# EAGLE board OpenPMU (LEM) Motherboard V37 (Hall Effect) (EAGLE 9.4.0)
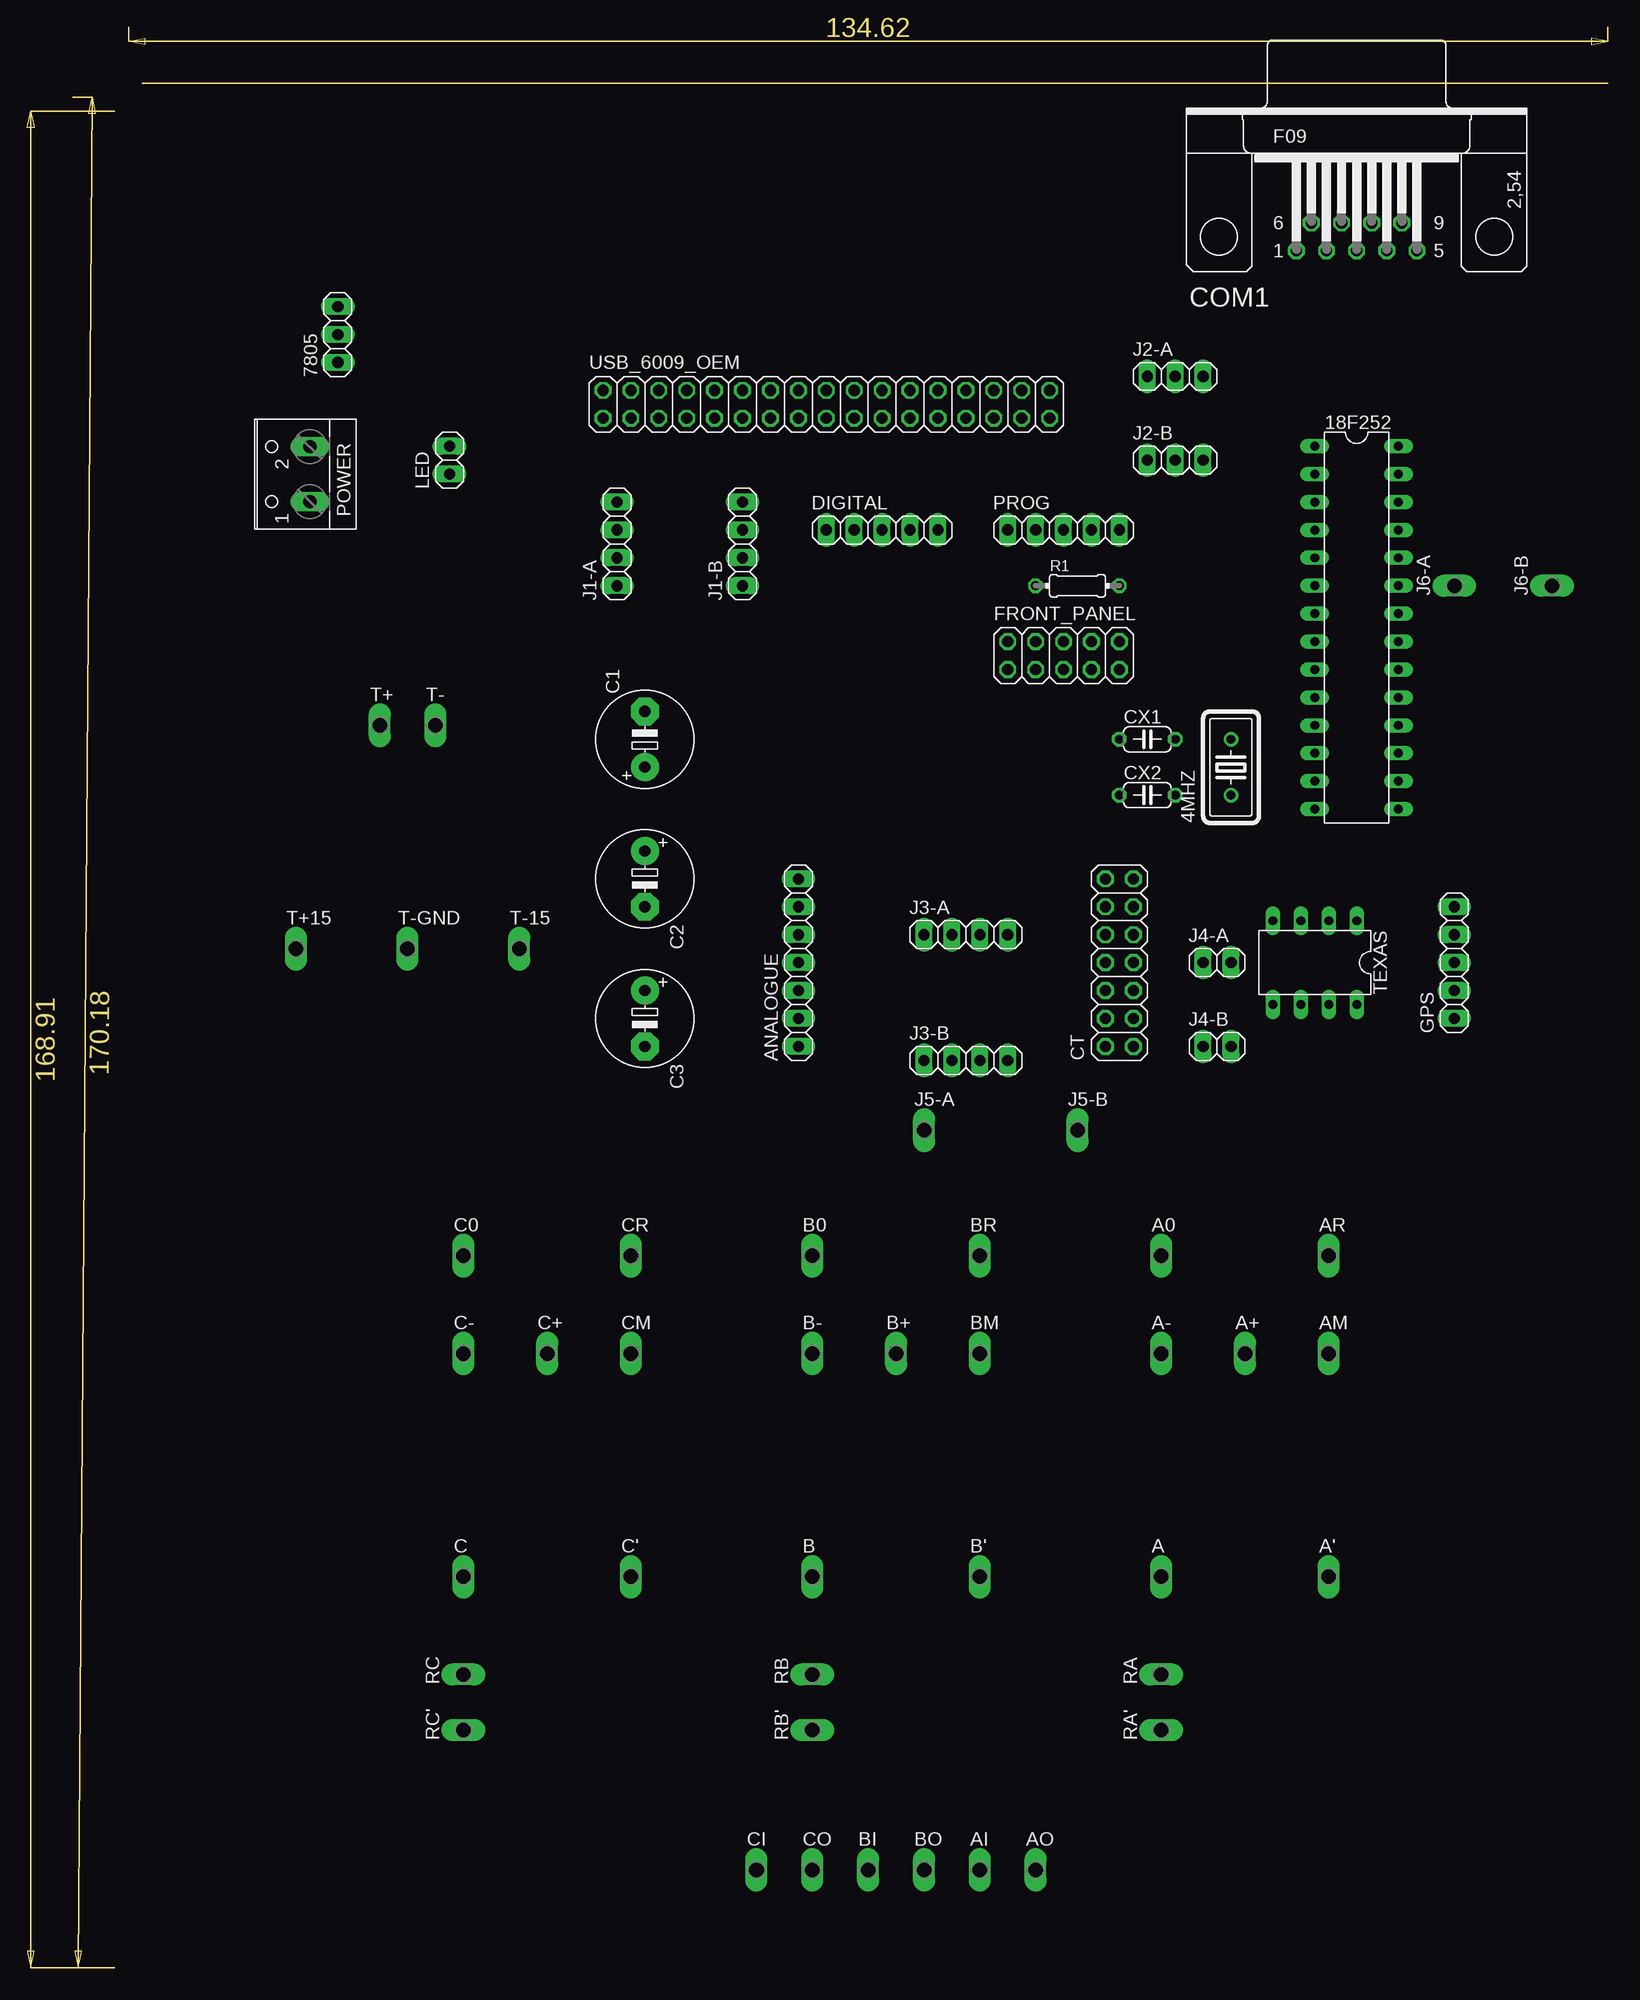
[diagram p0: board, top side]
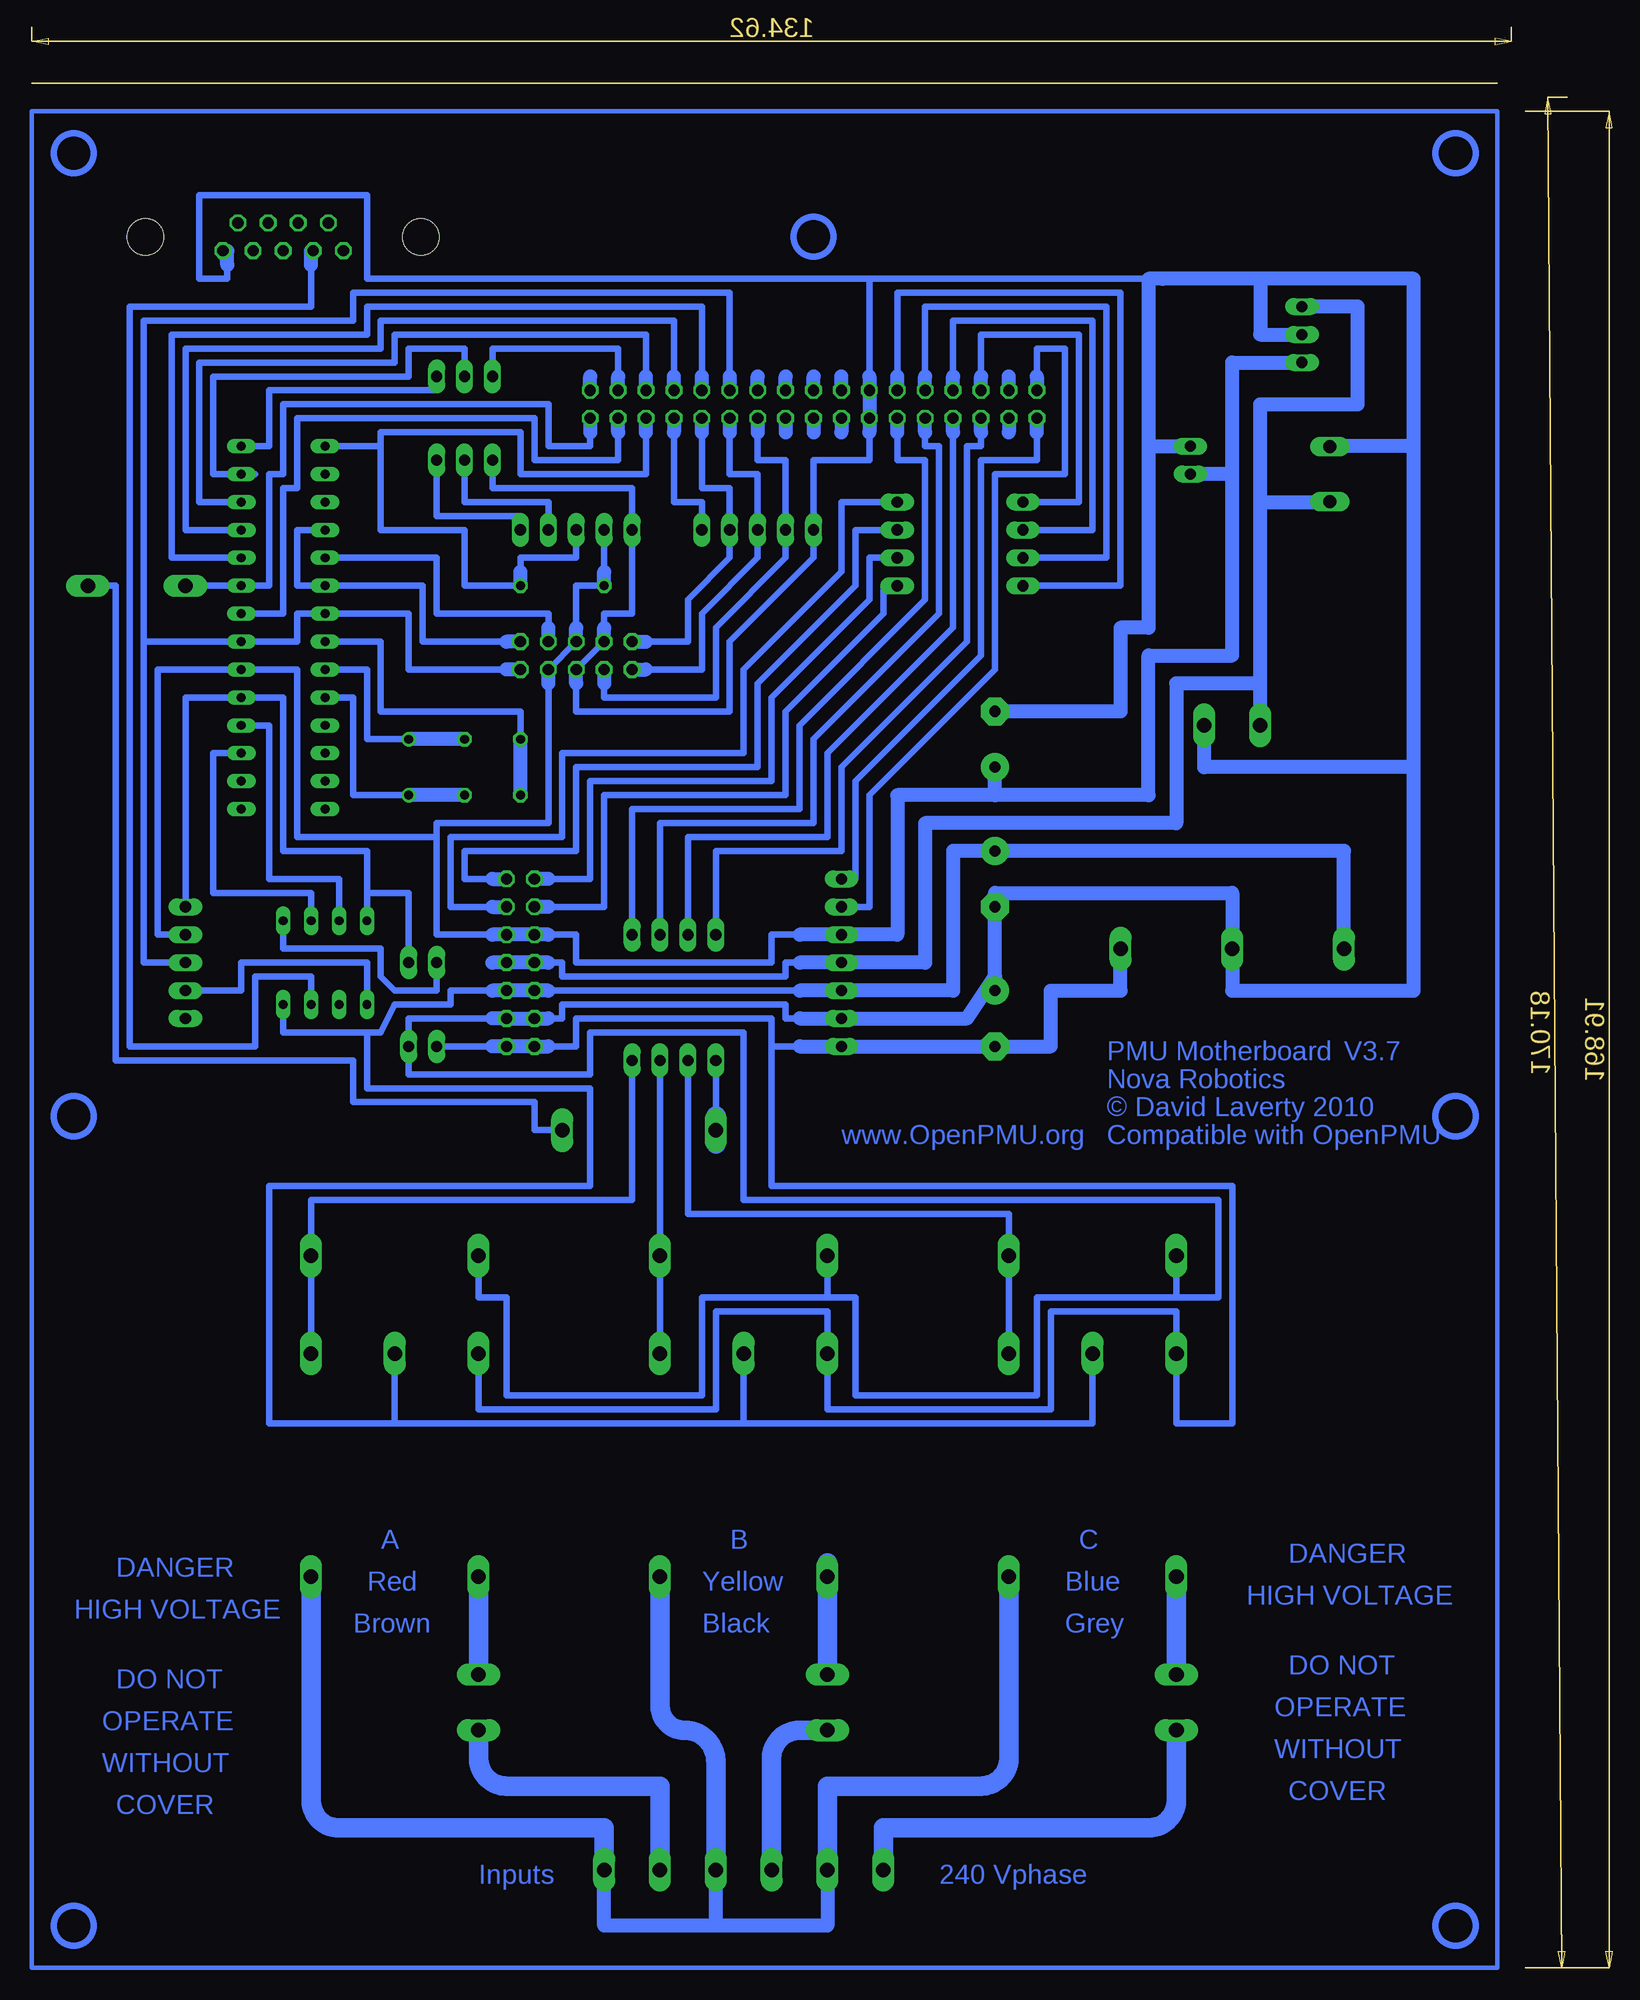
[diagram p1: board, bottom side, seen from below]

Size 143.81 x 176.54 mm. Coordinates in mm from the lower left corner, seen from the top.
Copper layers (1*16): Top 0.035mm / dielectric 1.5mm / Bottom 0.035mm
Design rules "default": minimum track width 10mil, minimum drill 24mil, track to track 8mil, track to pad 8mil, pad to pad 8mil, via to via 8mil, smd to smd 8mil, copper to edge 40mil, drill to drill 8mil, minimum pad ring 10mil, minimum via ring 8mil, stop-mask expansion 4mil, vias tented up to drill 0mil, thermal gap 10mil

## Footprints (pad centres in the part's own frame; a part is rotated, then mirrored left to right if it is on the bottom)
HC18U-V = drill 0.813: 1 -2.54,0; 2 2.54,0
DIL28-3 = drill 0.813 long: 1 -16.51,-3.81; 2 -13.97,-3.81; 3 -11.43,-3.81; 4 -8.89,-3.81; 5 -6.35,-3.81; 6 -3.81,-3.81; 7 -1.27,-3.81; 8 1.27,-3.81; 9 3.81,-3.81; 10 6.35,-3.81; 11 8.89,-3.81; 12 11.43,-3.81; 13 13.97,-3.81; 14 16.51,-3.81; 15 16.51,3.81; 16 13.97,3.81; 17 11.43,3.81; 18 8.89,3.81; 19 6.35,3.81; 20 3.81,3.81; 21 1.27,3.81; 22 -1.27,3.81; 23 -3.81,3.81; 24 -6.35,3.81; 25 -8.89,3.81; 26 -11.43,3.81; 27 -13.97,3.81; 28 -16.51,3.81
1X03 = drill 1.016 long: 1 -2.54,0; 2 0,0; 3 2.54,0
P1-13Y = drill 1.321 pad 1.905 long: 1 0,0
1X07 = drill 1.016 long: 1 -7.62,0; 2 -5.08,0; 3 -2.54,0; 4 0,0; 5 2.54,0; 6 5.08,0; 7 7.62,0
E5-8,5 = drill 1.016 pad 2.54: + -2.54,0 | drill 1.016 pad 2.54 octagon: - 2.54,0
F09H = drill 1.016 octagon: 1 -5.486,-1.27; 2 -2.743,-1.27; 3 0,-1.27; 4 2.743,-1.27; 5 5.486,-1.27; 6 -4.115,1.27; 7 -1.372,1.27; 8 1.372,1.27; 9 4.115,1.27 | hole 3.302: -12.522,0; 12.522,0
2X07 = drill 1.016 octagon: 1 -7.62,-1.27; 2 -7.62,1.27; 3 -5.08,-1.27; 4 -5.08,1.27; 5 -2.54,-1.27; 6 -2.54,1.27; 7 0,-1.27; 8 0,1.27; 9 2.54,-1.27; 10 2.54,1.27; 11 5.08,-1.27; 12 5.08,1.27; 13 7.62,-1.27; 14 7.62,1.27
C050-024X044 = drill 0.813 octagon: 1 -2.54,0; 2 2.54,0
1X05 = drill 1.016 long: 1 -5.08,0; 2 -2.54,0; 3 0,0; 4 2.54,0; 5 5.08,0
2X05 = drill 1.016 octagon: 1 -5.08,-1.27; 2 -5.08,1.27; 3 -2.54,-1.27; 4 -2.54,1.27; 5 0,-1.27; 6 0,1.27; 7 2.54,-1.27; 8 2.54,1.27; 9 5.08,-1.27; 10 5.08,1.27
1X04 = drill 1.016 long: 1 -3.81,0; 2 -1.27,0; 3 1.27,0; 4 3.81,0
1X02 = drill 1.016 long: 1 -1.27,0; 2 1.27,0
W237-102 = drill 1.194 long: 1 -2.5,-1.27; 2 2.5,-1.27
0204/7 = drill 0.813 octagon: 1 -3.81,0; 2 3.81,0
DIL08 = drill 0.813 long: 1 -3.81,-3.81; 2 -1.27,-3.81; 3 1.27,-3.81; 4 3.81,-3.81; 5 3.81,3.81; 6 1.27,3.81; 7 -1.27,3.81; 8 -3.81,3.81
2X17 = drill 1.016 octagon: 1 -20.32,-1.27; 2 -20.32,1.27; 3 -17.78,-1.27; 4 -17.78,1.27; 5 -15.24,-1.27; 6 -15.24,1.27; 7 -12.7,-1.27; 8 -12.7,1.27; 9 -10.16,-1.27; 10 -10.16,1.27; 11 -7.62,-1.27; 12 -7.62,1.27; 13 -5.08,-1.27; 14 -5.08,1.27; 15 -2.54,-1.27; 16 -2.54,1.27; 17 0,-1.27; 18 0,1.27; 19 2.54,-1.27; 20 2.54,1.27; 21 5.08,-1.27; 22 5.08,1.27; 23 7.62,-1.27; 24 7.62,1.27; 25 10.16,-1.27; 26 10.16,1.27; 27 12.7,-1.27; 28 12.7,1.27; 29 15.24,-1.27; 30 15.24,1.27; 31 17.78,-1.27; 32 17.78,1.27; 33 20.32,-1.27; 34 20.32,1.27

## Placement (x,y rotation side)
4MHZ  [HC18U-V]  109.52,109.23 90 top
18F252  [DIL28-3]  120.95,121.93 270 top
7805  [1X03]  28.24,148.6 90 top
A  [P1-13Y]  103.17,35.57 0 top
A0  [P1-13Y]  103.17,64.78 0 top
A'  [P1-13Y]  118.41,35.57 0 top
A+  [P1-13Y]  110.79,55.89 0 top
A-  [P1-13Y]  103.17,55.89 0 top
AI  [P1-13Y]  86.66,8.9 0 top
AM  [P1-13Y]  118.41,55.89 0 top
ANALOGUE  [1X07]  70.15,91.45 90 top
AO  [P1-13Y]  91.74,8.9 0 top
AR  [P1-13Y]  118.41,64.78 0 top
B  [P1-13Y]  71.42,35.57 0 top
B0  [P1-13Y]  71.42,64.78 0 top
B'  [P1-13Y]  86.66,35.57 0 top
B+  [P1-13Y]  79.04,55.89 0 top
B-  [P1-13Y]  71.42,55.89 0 top
BI  [P1-13Y]  76.5,8.9 0 top
BM  [P1-13Y]  86.66,55.89 0 top
BO  [P1-13Y]  81.58,8.9 0 top
BR  [P1-13Y]  86.66,64.78 0 top
C  [P1-13Y]  39.67,35.57 0 top
C0  [P1-13Y]  39.67,64.78 0 top
C1  [E5-8,5]  56.18,111.77 90 top
C2  [E5-8,5]  56.18,99.07 270 top
C3  [E5-8,5]  56.18,86.37 270 top
C'  [P1-13Y]  54.91,35.57 0 top
C+  [P1-13Y]  47.29,55.89 0 top
C-  [P1-13Y]  39.67,55.89 0 top
CI  [P1-13Y]  66.34,8.9 0 top
CM  [P1-13Y]  54.91,55.89 0 top
CO  [P1-13Y]  71.42,8.9 0 top
COM1  [F09H]  120.95,157.49 0 top
CR  [P1-13Y]  54.91,64.78 0 top
CT  [2X07]  99.36,91.45 90 top
CX1  [C050-024X044]  101.9,111.77 0 top
CX2  [C050-024X044]  101.9,106.69 0 top
DIGITAL  [1X05]  77.77,130.82 0 top
FRONT_PANEL  [2X05]  94.28,119.39 0 top
GPS  [1X05]  129.84,91.45 90 top
J1-A  [1X04]  53.64,129.55 90 top
J1-B  [1X04]  65.07,129.55 90 top
J2-A  [1X03]  104.44,144.79 0 top
J2-B  [1X03]  104.44,137.17 0 top
J3-A  [1X04]  85.39,93.99 0 top
J3-B  [1X04]  85.39,82.56 0 top
J4-A  [1X02]  108.25,91.45 0 top
J4-B  [1X02]  108.25,83.83 0 top
J5-A  [P1-13Y]  81.58,76.21 0 top
J5-B  [P1-13Y]  95.55,76.21 0 top
J6-A  [P1-13Y]  129.84,125.74 90 top
J6-B  [P1-13Y]  138.73,125.74 90 top
LED  [1X02]  38.4,137.17 90 top
POWER  [W237-102]  24.43,135.9 90 top
PROG  [1X05]  94.28,130.82 0 top
R1  [0204/7]  95.55,125.74 0 top
RA  [P1-13Y]  103.17,26.68 90 top
RA'  [P1-13Y]  103.17,21.6 90 top
RB  [P1-13Y]  71.42,26.68 90 top
RB'  [P1-13Y]  71.42,21.6 90 top
RC  [P1-13Y]  39.67,26.68 90 top
RC'  [P1-13Y]  39.67,21.6 90 top
T+  [P1-13Y]  32.05,113.04 0 top
T+15  [P1-13Y]  24.43,92.72 0 top
T-  [P1-13Y]  37.13,113.04 0 top
T-15  [P1-13Y]  44.75,92.72 0 top
T-GND  [P1-13Y]  34.59,92.72 0 top
TEXAS  [DIL08]  117.14,91.45 180 top
USB_6009_OEM  [2X17]  72.69,142.25 0 top

## Library data of the parts
4MHZ = crystal
18F252 TEXAS = ic-package
7805 ANALOGUE CT DIGITAL FRONT_PANEL GPS J1-A J1-B J2-A J2-B J3-A J3-B J4-A J4-B LED PROG USB_6009_OEM = pinhead
A A0 A' A+ A- AI AM AO AR B B0 B' B+ B- BI BM BO BR C C0 C' C+ C- CI CM CO CR J5-A J5-B J6-A J6-B RA RA' RB RB' RC RC' T+ T+15 T- T-15 T-GND = testpad
C1-C3 CX1 CX2 R1 = rcl
COM1 = con-subd
POWER = con-wago-500

## Nets
AI0: J3-A.4 USB_6009_OEM.11
AI1: J3-A.3 USB_6009_OEM.9
AI2: J3-A.2 USB_6009_OEM.7
AI3: J3-A.1 USB_6009_OEM.5
AI4: J1-A.1 USB_6009_OEM.12
AI5: J1-A.2 USB_6009_OEM.10
AI6: J1-A.3 USB_6009_OEM.8
AI7: J1-A.4 USB_6009_OEM.6
GND2: 18F252.19 GPS.5 J4-A.2 TEXAS.4
GROUND: 7805.2 A0.1 B0.1 C0.1 C3.+ FRONT_PANEL.4 FRONT_PANEL.5 J2-B.1 LED.2 USB_6009_OEM.13
S$1: 18F252.24 USB_6009_OEM.26
S$2: ANALOGUE.7 USB_6009_OEM.1
S$3: DIGITAL.5 USB_6009_OEM.27
S$4: 4MHZ.1 18F252.10
S$5: J3-B.1
S$6: 18F252.28
S$7: 4MHZ.2 18F252.9
S$8: 18F252.8
S$9: CI.1 RC'.1
S$10: C.1 RC.1
S$11: J1-B.4
S$12: J1-B.3
S$13: J1-B.2
S$14: J1-B.1
S$15: A'.1 AO.1 B'.1 BO.1 C'.1 CO.1
S$16: BI.1 RB'.1
S$17: RB.1
S$18: USB_6009_OEM.4
S$19: CM.1 CR.1 J3-B.2
S$20: FRONT_PANEL.2 USB_6009_OEM.25
S$21: FRONT_PANEL.1 USB_6009_OEM.23
S$22: FRONT_PANEL.3 USB_6009_OEM.21
S$23: AI.1 RA'.1
S$24: 18F252.25 USB_6009_OEM.28
S$25: 18F252.4 18F252.6 FRONT_PANEL.10
S$27: 18F252.21 FRONT_PANEL.9 GPS.3 USB_6009_OEM.24
S$28: BM.1 BR.1 J3-B.3
S$29: AM.1 AR.1 J3-B.4
S$30: GPS.2 TEXAS.5
S$31: TEXAS.7
S$32: ANALOGUE.6 USB_6009_OEM.2
S$33: 18F252.23 J6-A.1 USB_6009_OEM.33
S$34: 18F252.26 USB_6009_OEM.30
S$35: 18F252.18 TEXAS.3
S$36: A.1 RA.1
S$37: 18F252.22 USB_6009_OEM.31
S$38: 18F252.5 FRONT_PANEL.8
S$39: J2-B.2 PROG.4
S$40: J2-B.3 PROG.5
S$41: 18F252.17 TEXAS.2
S$42: 18F252.1 PROG.3 USB_6009_OEM.29
S$43: USB_6009_OEM.3
S$44: USB_6009_OEM.16
S$45: J2-A.1 USB_6009_OEM.32
S$46: USB_6009_OEM.18
S$47: USB_6009_OEM.20
S$48: USB_6009_OEM.22
S$49: USB_6009_OEM.19
S$50: USB_6009_OEM.17
S$51: USB_6009_OEM.15
S$52: USB_6009_OEM.34
S$53: J5-B.1 J6-B.1
V5V: 18F252.20 7805.1 C1.+ FRONT_PANEL.6 FRONT_PANEL.7 GPS.4 LED.1 PROG.2
V12V: 7805.3 T+.1
V+15: A+.1 B+.1 C+.1 T+15.1 TEXAS.8
V-15: A-.1 C-.1 J4-B.1 T-15.1
V-15-2: J4-A.1 TEXAS.1

## Tracks (layer width: path | path; a pad name or v marks a point on that pad's centre or on a via)
AI0
  Bottom 0.61: J3-A.4 89.2,105.42 73.96,105.42 73.96,113.04 62.53,124.47 62.53,137.17 65.07,137.17 65.07,139.71
  Bottom 1.27: 65.07,139.71 USB_6009_OEM.11
AI1
  Bottom 0.61: J3-A.3 86.66,104.15 72.69,104.15 72.69,111.77 61.26,123.2 61.26,138.44 62.53,138.44 62.53,139.71
  Bottom 1.27: 62.53,139.71 USB_6009_OEM.9
AI2
  Bottom 0.61: 59.99,139.71 59.99,121.93 71.42,110.5 71.42,102.88 84.12,102.88 J3-A.2
  Bottom 1.27: 59.99,139.71 USB_6009_OEM.7
AI3
  Bottom 0.61: J3-A.1 81.58,101.61 70.15,101.61 70.15,109.23 58.72,120.66 58.72,138.44 57.45,138.44 57.45,139.71
  Bottom 1.27: 57.45,139.71 USB_6009_OEM.5
AI4
  Bottom 0.61: J1-A.1 44.75,125.74 44.75,152.41 65.07,152.41 65.07,144.79
  Bottom 1.27: USB_6009_OEM.12 65.07,144.79
AI5
  Bottom 0.61: 62.53,144.79 62.53,151.14 46.02,151.14 46.02,128.28 J1-A.2
  Bottom 1.27: USB_6009_OEM.10 62.53,144.79
AI6
  Bottom 0.61: J1-A.3 47.29,130.82 47.29,149.87 59.99,149.87 59.99,144.79
  Bottom 1.27: USB_6009_OEM.8 59.99,144.79
AI7
  Bottom 0.61: J1-A.4 48.56,133.36 48.56,148.6 57.45,148.6 57.45,144.79
  Bottom 1.27: USB_6009_OEM.6 57.45,144.79
CURRENT_HF
  Bottom 0.406: 143.81,0.01 143.81,168.92 10.46,168.92 10.46,0.01 143.81,0.01
GND2
  Bottom 0.61: GPS.5 129.84,115.58 127.3,115.58 | 127.3,115.58 18F252.19 | 127.3,115.58 120.95,115.58 120.95,101.61 113.33,101.61 113.33,97.8 | 113.33,97.8 TEXAS.4 | 113.33,97.8 109.52,97.8 J4-A.2
GROUND
  Bottom 0.61: FRONT_PANEL.5 FRONT_PANEL.4 | 94.28,116.85 94.28,114.31 80.31,114.31 80.31,120.66 72.69,128.28 72.69,137.17 67.61,137.17 67.61,139.71 USB_6009_OEM.13 | 126.03,154.95 126.03,153.68 128.57,153.68 128.57,161.3 113.33,161.3 113.33,153.68 67.61,153.68 | 67.61,153.68 67.61,144.79 | 40.94,153.68 67.61,153.68 | 73.96,86.37 75.23,86.37 75.23,87.64 95.55,87.64 95.55,86.37 98.09,86.37 | A0.1 103.17,60.97 100.63,60.97 100.63,52.08 82.85,52.08 82.85,60.97 71.42,60.97 | 100.63,86.37 109.52,86.37 109.52,81.29 93.01,81.29 93.01,85.1 79.04,85.1 79.04,69.86 35.86,69.86 35.86,60.97 39.67,60.97 | 71.42,60.97 B0.1 | 71.42,60.97 68.88,60.97 68.88,52.08 52.37,52.08 52.37,60.97 39.67,60.97 | C0.1 39.67,60.97 | J2-B.1 101.9,134.63 89.2,134.63 89.2,123.2 91.74,123.2 91.74,121.93
  Bottom 1.27: FRONT_PANEL.4 91.74,121.93 | 94.28,116.85 FRONT_PANEL.5 | 126.03,154.95 126.03,156.22 | 56.18,114.31 44.75,114.31 44.75,121.93 42.21,121.93 42.21,138.44 | 42.21,138.44 LED.2 | USB_6009_OEM.13 67.61,144.79 67.61,139.71 | 42.21,138.44 42.21,153.68 40.94,153.68 32.05,153.68 | 7805.2 32.05,148.6 32.05,153.68 | 32.05,153.68 18.08,153.68 18.08,138.44 | 37.13,114.31 37.13,109.23 18.08,109.23 | 18.08,138.44 25.7,138.44 | 18.08,109.23 18.08,138.44 | 18.08,109.23 18.08,88.91 34.59,88.91 34.59,92.72 | 34.59,92.72 34.59,91.45 | 34.59,92.72 34.59,97.8 56.18,97.8 56.18,90.18 | 56.18,90.18 C3.+ | 56.18,90.18 58.72,86.37 73.96,86.37 | 96.82,86.37 98.09,86.37 100.63,86.37 101.9,86.37
S$1
  Bottom 0.61: 18F252.24 131.11,128.28 131.11,148.6 113.33,148.6 113.33,151.14 82.85,151.14 82.85,144.79
  Bottom 1.27: USB_6009_OEM.26 82.85,144.79
S$2
  Bottom 0.61: 52.37,139.71 52.37,137.17 57.45,137.17 57.45,119.39 68.88,107.96 68.88,99.07 ANALOGUE.7
  Bottom 1.27: 52.37,139.71 USB_6009_OEM.1
S$3
  Bottom 0.61: USB_6009_OEM.27 85.39,133.36 82.85,133.36 DIGITAL.5
  Bottom 1.27: USB_6009_OEM.27 85.39,139.71
S$4
  Bottom 0.61: 18F252.10 114.6,115.58 114.6,106.69 4MHZ.1
  Bottom 1.27: 104.44,106.69 4MHZ.1
S$5
  Bottom 0.61: J3-B.1 81.58,77.48
  Bottom 1.778: 81.58,77.48 81.58,74.94
S$6
  Bottom 0.61: 18F252.28 122.22,138.44 122.22,143.52 106.98,143.52 106.98,144.79
S$7
  Bottom 0.61: 4MHZ.2 113.33,111.77 113.33,118.12 18F252.9
  Bottom 1.27: 104.44,111.77 4MHZ.2
S$8
  Bottom 0.61: 99.36,111.77 99.36,114.31 112.06,114.31 112.06,120.66 18F252.8
  Bottom 1.27: 99.36,106.69 99.36,111.77
S$9
  Bottom 1.778: CI.1 66.34,12.71 42.21,12.71 arc-90 39.67,15.25 RC'.1
S$10
  Bottom 1.778: RC.1 C.1
S$11
  Bottom 0.61: 101.9,96.53 105.71,96.53 105.71,102.88 95.55,102.88 95.55,110.5 79.04,110.5 79.04,118.12 70.15,127.01 70.15,133.36 J1-B.4
  Bottom 1.27: 101.9,96.53 100.63,96.53
S$12
  Bottom 0.61: J1-B.3 68.88,130.82 68.88,125.74 77.77,116.85 77.77,109.23 94.28,109.23 94.28,101.61 104.44,101.61 104.44,99.07 101.9,99.07
  Bottom 1.27: 101.9,99.07 100.63,99.07
S$13
  Bottom 0.61: 96.82,99.07 93.01,99.07 93.01,107.96 76.5,107.96 76.5,115.58 67.61,124.47 67.61,128.28 J1-B.2
  Bottom 1.27: 96.82,99.07 98.09,99.07
S$14
  Bottom 0.61: 96.82,96.53 91.74,96.53 91.74,106.69 75.23,106.69 75.23,114.31 66.34,123.2 66.34,125.74 J1-B.1
  Bottom 1.27: 96.82,96.53 98.09,96.53
S$15
  Bottom 1.27: CO.1 71.42,3.82 81.58,3.82 | 81.58,3.82 BO.1 | 81.58,3.82 91.74,3.82 AO.1
  Bottom 1.778: C'.1 54.91,19.06 arc90 57.45,16.52 71.42,16.52 CO.1 | B'.1 86.66,23.84 arc-90 84.42,21.6 arc90 81.58,18.76 BO.1 | A'.1 118.41,15.25 arc-90 115.87,12.71 91.74,12.71 AO.1
S$16
  Bottom 1.778: BI.1 76.5,19.06 arc90 73.96,21.6 RB'.1
S$17
  Bottom 1.778: RB.1 71.42,36.84
S$18
  Bottom 1.27: USB_6009_OEM.4 54.91,144.79
S$19
  Bottom 0.61: CM.1 54.91,63.51 | 54.91,63.51 CR.1 | 54.91,63.51 54.91,68.59 84.12,68.59 J3-B.2
S$20
  Bottom 0.61: 82.85,139.71 82.85,134.63 80.31,134.63 80.31,128.28 84.12,124.47 84.12,120.66 87.93,120.66
  Bottom 1.27: 82.85,139.71 USB_6009_OEM.25 | FRONT_PANEL.2 87.93,120.66
S$21
  Bottom 0.61: USB_6009_OEM.23 80.31,135.9 77.77,135.9 77.77,128.28 82.85,123.2 82.85,118.12 87.93,118.12
  Bottom 1.27: USB_6009_OEM.23 80.31,139.71 | FRONT_PANEL.1 87.93,118.12
S$22
  Bottom 0.61: USB_6009_OEM.21 77.77,137.17 75.23,137.17 75.23,128.28 81.58,121.93 81.58,115.58 91.74,115.58 91.74,116.85
  Bottom 1.27: USB_6009_OEM.21 77.77,139.71 | FRONT_PANEL.3 91.74,116.85
S$23
  Bottom 1.778: AI.1 86.66,16.52 100.63,16.52 arc90 103.17,19.06 RA'.1
S$24
  Bottom 0.61: USB_6009_OEM.28 85.39,149.87 112.06,149.87 112.06,147.33 129.84,147.33 129.84,130.82 18F252.25
  Bottom 1.27: USB_6009_OEM.28 85.39,144.79
S$25
  Bottom 0.61: 100.63,120.66 108.25,120.66 108.25,125.74 18F252.6 119.68,125.74 119.68,130.82 18F252.4
  Bottom 1.27: FRONT_PANEL.10 100.63,120.66
S$26
  Bottom 0.61: 104.44,144.79 104.44,147.33 109.52,147.33 109.52,144.79 127.3,144.79 127.3,135.9 123.49,135.9
S$27
  Bottom 0.61: 133.65,120.66 133.65,149.87 114.6,149.87 114.6,152.41 80.31,152.41 80.31,144.79 | 133.65,120.66 18F252.21 119.68,120.66 119.68,123.2 109.52,123.2 109.52,118.12 100.63,118.12 | 133.65,120.66 133.65,91.45 GPS.3
  Bottom 1.27: 80.31,144.79 USB_6009_OEM.24 | FRONT_PANEL.9 100.63,118.12
S$28
  Bottom 0.61: BM.1 BR.1 J3-B.3
S$29
  Bottom 0.61: 118.41,63.51 AM.1 | 118.41,63.51 AR.1 | 118.41,63.51 118.41,69.86 89.2,69.86 J3-B.4
S$30
  Bottom 0.61: GPS.2 124.76,88.91 124.76,91.45 113.33,91.45 TEXAS.5
S$31
  Bottom 0.61: 118.41,154.95 118.41,151.14 134.92,151.14 134.92,83.83 123.49,83.83 123.49,90.18 118.41,90.18 TEXAS.7
  Bottom 1.27: 118.41,154.95 118.41,156.22
S$32
  Bottom 0.61: 52.37,144.79 52.37,147.33 49.83,147.33 49.83,135.9 56.18,135.9 56.18,118.12 67.61,106.69 67.61,96.53 ANALOGUE.6
  Bottom 1.27: 52.37,144.79 USB_6009_OEM.2
S$33
  Bottom 0.61: USB_6009_OEM.33 93.01,138.44 96.82,138.44 96.82,142.25 120.95,142.25 120.95,135.9 122.22,135.9 122.22,125.74 123.49,125.74 | 123.49,125.74 18F252.23 | J6-A.1 123.49,125.74
  Bottom 1.27: USB_6009_OEM.33 93.01,139.71
S$34
  Bottom 0.61: USB_6009_OEM.30 87.93,148.6 110.79,148.6 110.79,146.06 128.57,146.06 128.57,133.36 18F252.26
  Bottom 1.27: USB_6009_OEM.30 87.93,144.79
S$35
  Bottom 0.61: 18F252.18 122.22,113.04 122.22,99.07 115.87,99.07 TEXAS.3
S$36
  Bottom 1.778: RA.1 A.1
S$37
  Bottom 0.61: 18F252.22 120.95,123.2 120.95,134.63 119.68,134.63 119.68,140.98 98.09,140.98 98.09,137.17 90.47,137.17 90.47,139.71
  Bottom 1.27: 90.47,139.71 USB_6009_OEM.31
S$38
  Bottom 0.61: 18F252.5 106.98,128.28 106.98,123.2 96.82,123.2 96.82,121.93
  Bottom 1.27: FRONT_PANEL.8 96.82,121.93
S$39
  Bottom 0.61: J2-B.2 104.44,133.36 96.82,133.36 PROG.4
S$40
  Bottom 0.61: J2-B.3 106.98,132.09 99.36,132.09 PROG.5
S$41
  Bottom 0.61: 18F252.17 127.3,110.5 127.3,97.8 118.41,97.8 TEXAS.2
S$42
  Bottom 0.61: 99.36,127.01 99.36,128.28 94.28,128.28 PROG.3 | 112.06,138.44 18F252.1 | 112.06,138.44 112.06,130.82 104.44,130.82 104.44,125.74 99.36,125.74 | 112.06,138.44 112.06,139.71 99.36,139.71 99.36,135.9 87.93,135.9 87.93,139.71
  Bottom 1.27: 87.93,139.71 USB_6009_OEM.29 | 99.36,125.74 99.36,127.01
S$43
  Bottom 1.27: USB_6009_OEM.3 54.91,139.71
S$44
  Bottom 1.27: USB_6009_OEM.16 70.15,144.79
S$45
  Bottom 0.61: 90.47,144.79 90.47,147.33 94.28,147.33 | J2-A.1 101.9,147.33 94.28,147.33 | 93.01,147.33 94.28,147.33
  Bottom 1.27: USB_6009_OEM.32 90.47,144.79
S$46
  Bottom 1.27: USB_6009_OEM.18 72.69,144.79
S$47
  Bottom 1.27: USB_6009_OEM.20 75.23,144.79
S$48
  Bottom 1.27: USB_6009_OEM.22 77.77,144.79
S$49
  Bottom 1.27: USB_6009_OEM.19 75.23,139.71
S$50
  Bottom 1.27: USB_6009_OEM.17 72.69,139.71
S$51
  Bottom 1.27: USB_6009_OEM.15 70.15,139.71
S$52
  Bottom 1.27: USB_6009_OEM.34 93.01,144.79
S$53
  Bottom 0.61: J5-B.1 98.09,76.21 98.09,78.75 114.6,78.75 114.6,82.56 136.19,82.56 136.19,125.74 J6-B.1
V5V
  Bottom 0.61: GPS.4 132.38,93.99 132.38,118.12 18F252.20 119.68,118.12 119.68,102.88 106.98,102.88 106.98,104.15 | FRONT_PANEL.7 FRONT_PANEL.6 | 96.82,116.85 96.82,104.15 106.98,104.15 | 106.98,104.15 106.98,93.99 101.9,93.99 | 96.82,93.99 94.28,93.99 94.28,91.45 76.5,91.45 76.5,93.99 73.96,93.99 | 91.74,127.01 PROG.2 | 91.74,125.74 94.28,125.74 94.28,121.93
  Bottom 1.27: FRONT_PANEL.6 94.28,121.93 | 96.82,116.85 FRONT_PANEL.7 | 96.82,93.99 101.9,93.99 | 7805.1 34.59,146.06 34.59,135.9 | 34.59,135.9 LED.1 | 73.96,93.99 65.07,93.99 65.07,106.69 56.18,106.69 | 34.59,135.9 34.59,119.39 42.21,119.39 42.21,106.69 56.18,106.69 | 56.18,106.69 C1.+ | 91.74,125.74 91.74,127.01
V12V
  Bottom 0.61: 73.96,91.45 75.23,91.45 75.23,90.18 95.55,90.18 95.55,91.45 96.82,91.45
  Bottom 1.27: 73.96,91.45 62.53,91.45 62.53,104.15 39.67,104.15 39.67,116.85 32.05,116.85 | 7805.3 23.16,151.14 23.16,142.25 32.05,142.25 32.05,133.36 | 32.05,133.36 25.7,133.36 | 32.05,116.85 32.05,133.36 | T+.1 32.05,116.85 | 96.82,91.45 101.9,91.45
V+15
  Bottom 0.61: A+.1 110.79,49.54 109.52,49.54 | 109.52,49.54 122.22,49.54 122.22,71.13 93.01,71.13 93.01,80.02 113.33,80.02 113.33,85.1 | 79.04,49.54 109.52,49.54 | 79.04,49.54 B+.1 | 79.04,49.54 47.29,49.54 C+.1 | TEXAS.8 120.95,85.1 113.33,85.1 | 113.33,85.1 112.06,85.1 110.79,87.64 105.71,87.64 105.71,88.91 101.9,88.91 | 73.96,88.91 96.82,88.91
  Bottom 1.27: 96.82,88.91 101.9,88.91 | 73.96,88.91 59.99,88.91 59.99,101.61 24.43,101.61 T+15.1
V-15
  Bottom 0.61: A-.1 103.17,50.81 81.58,50.81 81.58,59.7 71.42,59.7 71.42,50.81 51.1,50.81 51.1,59.7 39.67,59.7 | 98.09,83.83 94.28,83.83 94.28,86.37 76.5,86.37 76.5,83.83 | 39.67,59.7 C-.1 | 39.67,59.7 39.67,49.54 34.59,49.54 34.59,71.13 76.5,71.13 76.5,83.83 | 76.5,83.83 73.96,83.83 | J4-B.1 101.9,83.83
  Bottom 1.27: 101.9,83.83 98.09,83.83 96.82,83.83 | T-15.1 44.75,88.91 51.1,88.91 51.1,83.83 73.96,83.83
V-15-2
  Bottom 0.61: TEXAS.1 120.95,92.72 112.06,92.72 112.06,90.18 110.79,88.91 106.98,88.91 J4-A.1
(copper drawn outside any net)
  shapes: Bottom circle x7

## Text on the board
Bottom: V3.7 | PMU Motherboard | Nova Robotics | © David Laverty 2010 | Compatible with OpenPMU | www.OpenPMU.org | C | B | A | DANGER | DANGER | Blue | Yellow | Red | HIGH VOLTAGE | HIGH VOLTAGE | Grey | Black | Brown | DO NOT | DO NOT | OPERATE | OPERATE | WITHOUT | WITHOUT | COVER | COVER | 240 Vphase | Inputs